# Altium PCB EvilDuckSD_pcb.PcbDoc
Units mm, origin at the board's own origin, x right, y up, seen from the top; angles counter-clockwise.
Board outline 40.39 x 17.78 mm, 2 copper layers (Top Layer, Bottom Layer); 25 components, 31 nets, 120 pads, 26 vias.
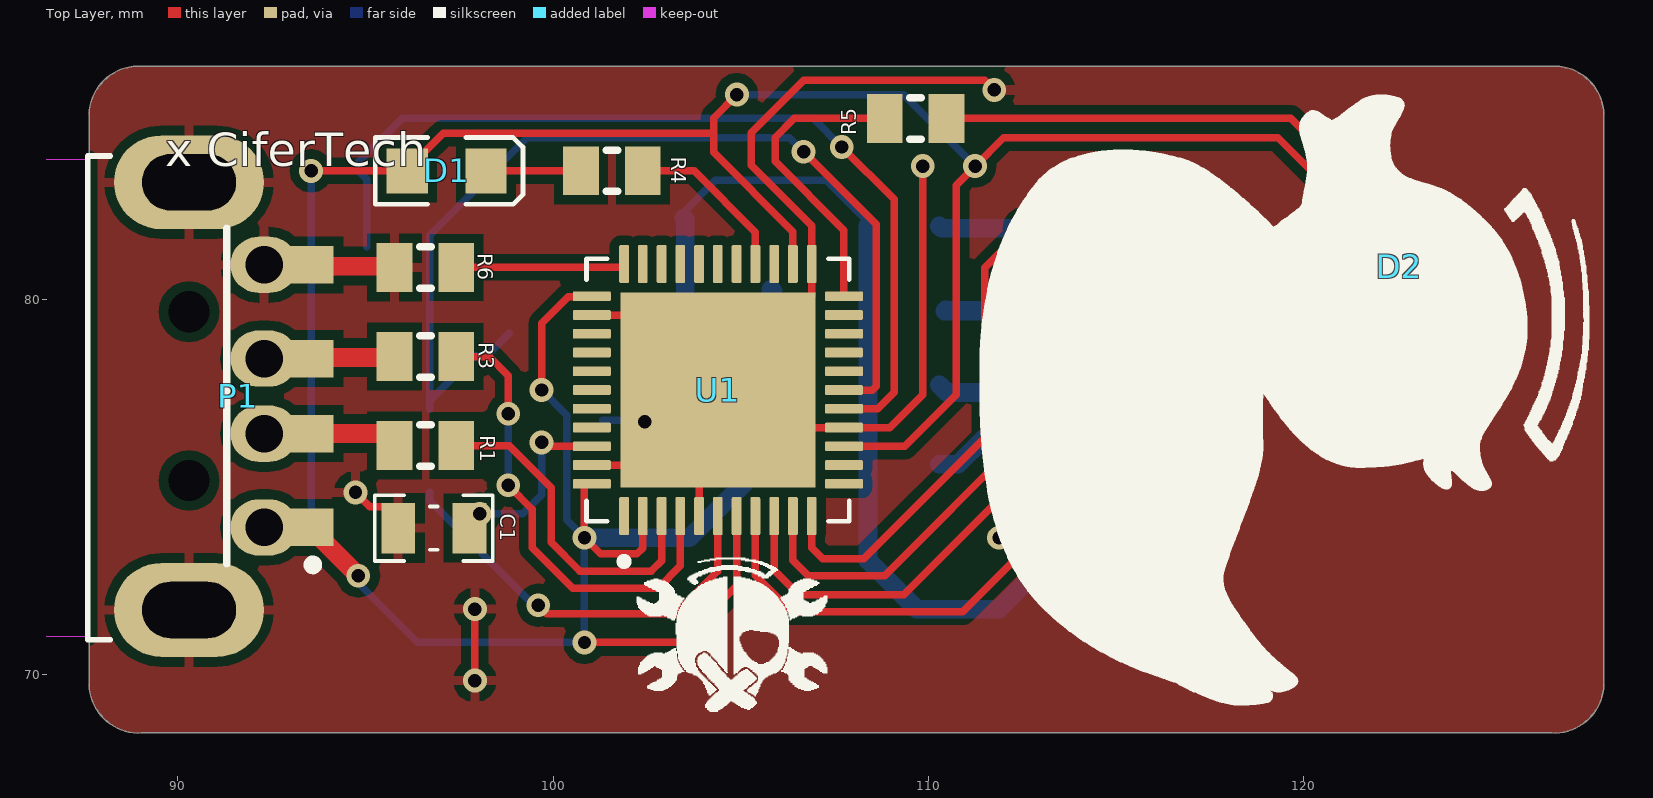
[diagram p0: Top Layer view]
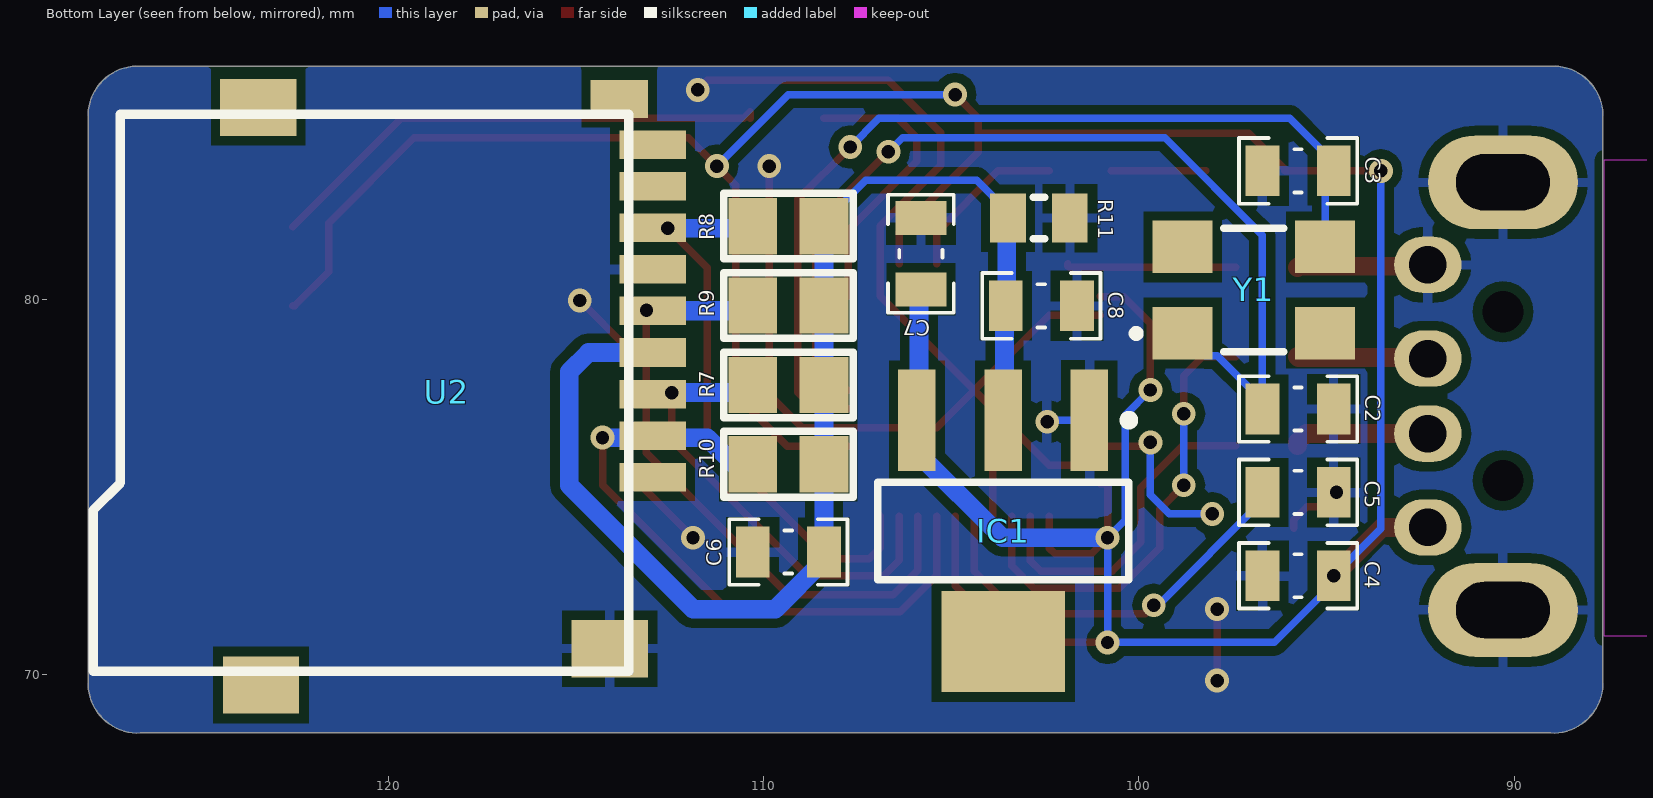
[diagram p1: Bottom Layer view, seen from below]
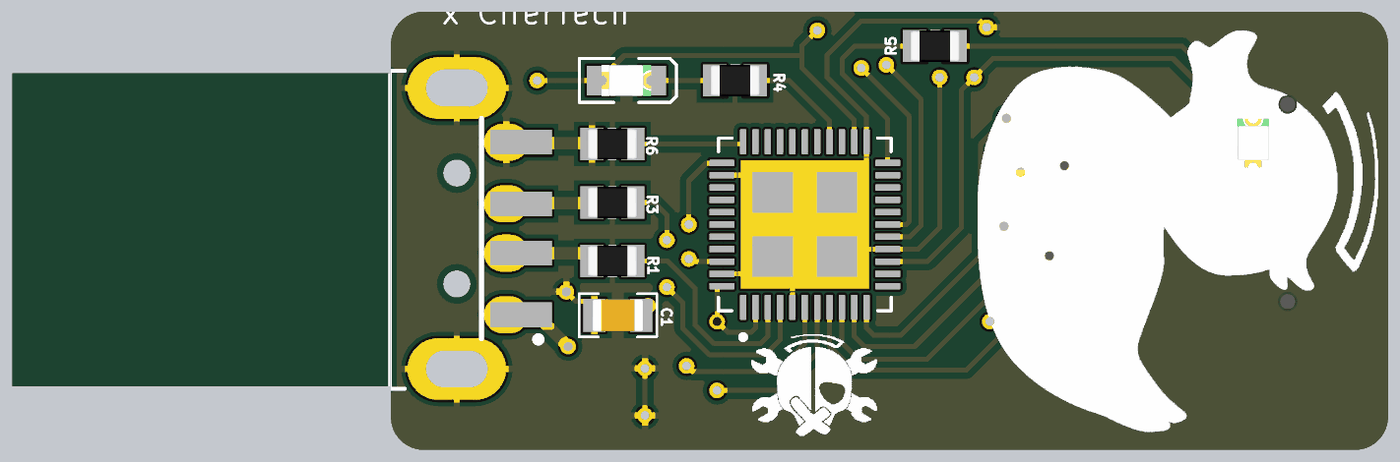
[diagram p2: 3D render of the assembled board from above, using the file's embedded part models]
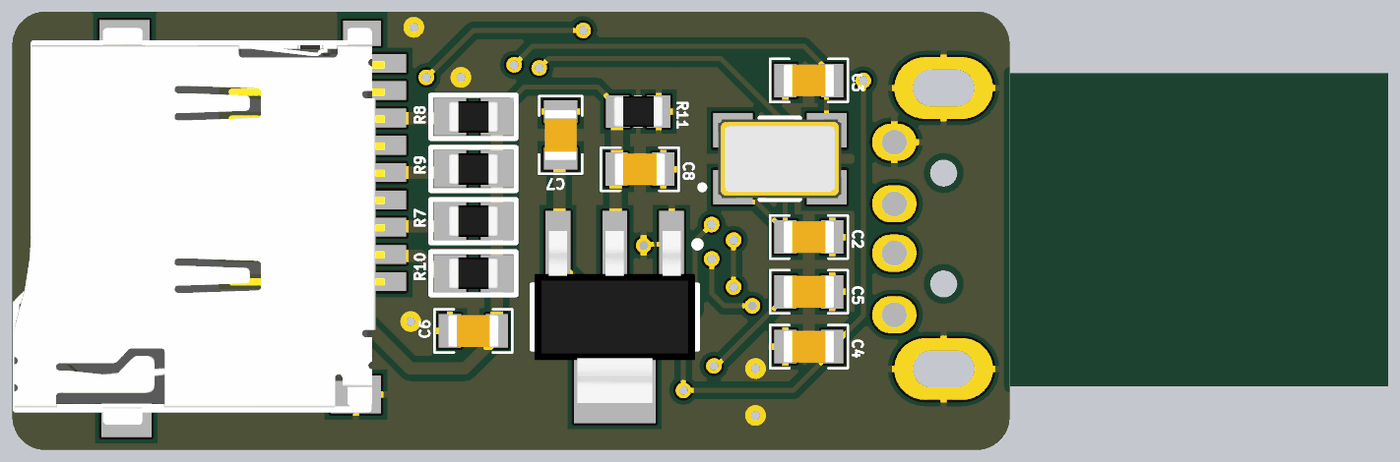
[diagram p3: 3D render of the assembled board from below, using the file's embedded part models]

## Layer stack, top to bottom
Top Solder: solder mask 0.0102, Solder Resist, Dk 3.5
Top Layer: signal copper 0.0356
Dielectric 1: dielectric 0.32, FR-4, Dk 4.8
Bottom Layer: signal copper 0.0356
Bottom Solder: solder mask 0.0102, Solder Resist, Dk 3.5

## Board outline
87.63,69.85 87.63,84.836 cw(c88.963,84.9) 89.027,86.233 126.619,86.233 cw(c126.682,84.9) 128.016,84.836 128.016,69.85 cw(c126.682,69.787) 126.619,68.453 89.027,68.453 cw(c88.963,69.787)

## Design rules (kind name [scope] priority, off if disabled: settings)
Clearance [All] p1: gap=0.254 ignorepadtopadclearanceinfootprint=FALSE except(0: Arc-Hole Track-Hole SMDPad-Hole THPad-Hole Via-Hole Fill-Hole Poly-Hole Region-Hole Text-Hole)
PolygonConnect [All] p1: connectstyle=Relief reliefconductorwidth=0.254 reliefentries=4 polygonreliefangle="90 Angle" airgapwidth=0.254
RoomDefinition EvilDuckSD_sch [InComponentClass('EvilDuckSD_sch')] p1: confinementstyle=ConfineIn formatcopy=TRUE lockcomponents=FALSE outline 0,0 50.8,0 50.8,25.4 0,25.4
RoutingVias [All] p1: holewidth=0.711 width=1.27 viastyle="Through Hole" minholewidth=0.711 minwidth=1.27 maxholewidth=0.711 maxwidth=1.27
SolderMaskExpansion [All] p1: expansion=0.102
Width [All] p1: maxlimit=1 minlimit=0.2 preferedwidth=0.5 minimp=50.000000 maximp=50.000000 favimp=50.000000
30 further rules are at their usual default settings.

## Components (designator, comment, footprint, x,y, rotation, side; value= is the part's Value field where it differs from the comment)
C1 "100nf" CAP0805 96.821,73.914 r0 top
C2 "22pf" CAP0805 95.758,77.089 r0 bottom
C3 "22pf" CAP0805 95.758,83.439 r180 bottom
C4 "1uf" CAP0805 95.758,72.644 r180 bottom
C5 "1uf" CAP0805 95.758,74.867 r0 bottom
C6 "100nf" CAP0805 109.347,73.279 r0 bottom
C7 "10uf" CAP0805 105.812,81.229 r270 bottom
C8 "10uf" CAP0805 102.603,79.841 r0 bottom
D1 "LED" LED_0805 97.164,83.439 r0 top
D2 "LED" LED_0805 122.555,80.899 r90 top
IC1 "LM1117" MP04A_M 103.619,73.842 r270 bottom
P1 "USB Connector" "USB A TYPE Right Angle" 87.597,77.434 r180 top
R1 "22" "RES 0805 (2012X06L)" 95.772,76.115 r0 top
R3 "22" "RES 0805 (2012X06L)" 95.772,78.489 r0 top
R4 "330" "RES 0805 (2012X06L)" 102.394,83.439 r180 top
R5 "330" "RES 0805 (2012X06L)" 108.839,84.836 r0 top
R6 "330" "RES 0805 (2012X06L)" 97.422,80.864 r180 top
R7 "10K" "RES 0805" 110.297,77.732 r270 bottom
R8 "10K" "RES 0805" 110.297,81.966 r270 bottom
R9 "10K" "RES 0805" 110.297,79.849 r270 bottom
R10 "10K" "RES 0805" 110.297,75.616 r270 bottom
R11 "330" "RES 0805 (2012X06L)" 101.842,82.179 r0 bottom
U1 "ATMEGA32U4-MU" QFN50P700X700X100-45N 104.394,77.596 r90 top
U2 "SD CARD SPI MODE" "MICRO SD" 113.602,84.947 r270 bottom
Y1 "16MHz" WE-XTAL_CFPX-104 96.935,80.264 r180 bottom

## Footprints (in the part's own frame and the unit in brackets; to place one, negate y for a bottom-side part, rotate by r counter-clockwise, add the part's x,y. Pads: shape width x height; smd on the part's side, far side on the other; paste and mask are expansions set on the pad)
CAP0805 [mm] "Chip Capacitor, 2-Leads, Body 2/00x1/25mm, IPC Medium Density DESIGNER:ABBAS BASEREH"
  rect 0.9x1.35 smd: 1(-0.95,0) 2(0.95,0)
  silkscreen extent -1.58,-0.87 1.58,0.87, body extent -1.02,-0.65 1.03,0.65, height 0.5
LED_0805 [mm] "Chip LED, 2-Leads, Body 2.0x1.3mm, IPC Medium Density"
  rect 1.1x1.2 smd: A(-1.05,0) K(1.05,0)
  silkscreen extent -1.91,-0.89 2.03,0.89, body extent -1,-0.63 1,0.62, height 0.68
"MICRO SD" [mil] "MICRO SD"
  rect 30x70 smd: 1(380.91,25.07) 2(337.29,25.07) 3(293.66,25.07) 4(250.04,25.07) 5(206.41,25.07) 6(162.79,25.07) 7(119.16,25.07) 8(75.54,25.07) 9(31.91,25.07)
  rect 60x80 smd: 6(-7.09,-388.93) 6(560.91,-19.93) 6(598.91,-385.93)
  rect 40x60 smd: 10(-16.09,-9.93)
  round 0 all layers, no hole: ""(97.44,-407.48) ""(414.37,-407.48)
  silkscreen extent 0,-562 585,0, body extent -25,-565 609,26, height 73
MP04A_M [mm] "SOT223, 4-Leads, Body 6.5x3.5mm, Pitch 2.3mm, Lead Span 7mm, IPC Low Density"
  rect 2.7x1 smd: 1(-2.95,2.3) 2(-2.95,0) 3(-2.95,-2.3)
  rect 2.7x3.3 smd: 4(2.95,0)
  silkscreen extent -3.07,-3.35 1.3,3.47, body extent -3.49,-3.24 3.49,3.24, height 1.64
QFN50P700X700X100-45N [mm]
  rrect25% 1.01x0.26 smd: 1(-3.36,2.5) 2(-3.36,2) 3(-3.36,1.5) 4(-3.36,1) 5(-3.36,0.5) 6(-3.36,0) 7(-3.36,-0.5) 8(-3.36,-1) 9(-3.36,-1.5) 10(-3.36,-2) 11(-3.36,-2.5) 23(3.36,-2.5) 24(3.36,-2) 25(3.36,-1.5) 26(3.36,-1) 27(3.36,-0.5) 28(3.36,0) 29(3.36,0.5) 30(3.36,1) 31(3.36,1.5) 32(3.36,2) 33(3.36,2.5)
  rrect25% 0.26x1.01 smd: 12(-2.5,-3.36) 13(-2,-3.36) 14(-1.5,-3.36) 15(-1,-3.36) 16(-0.5,-3.36) 17(0,-3.36) 18(0.5,-3.36) 19(1,-3.36) 20(1.5,-3.36) 21(2,-3.36) 22(2.5,-3.36) 34(2.5,3.36) 35(2,3.36) 36(1.5,3.36) 37(1,3.36) 38(0.5,3.36) 39(0,3.36) 40(-0.5,3.36) 41(-1,3.36) 42(-1.5,3.36) 43(-2,3.36) 44(-2.5,3.36)
  rect 5.2x5.2 smd paste-4: 45(0,0)
  silkscreen extent -4.67,-3.5 3.5,3.5
"RES 0805" [mm] "RES 0805"
  rect 1.5x1.3 smd: 1(0,0) 2(0,1.9)
  silkscreen extent -0.87,-0.77 0.87,2.68, body extent -0.63,-0.07 0.64,1.97, height 0.6
"RES 0805 (2012X06L)" [mm] "Chip Resistor, 2-Leads, Body 2.0x1.3mm, IPC High Density _ (0.100 W)"
  rect 0.95x1.3 smd: 1(0,0) 2(1.65,0)
  silkscreen extent 0.67,-0.55 0.97,0.55, body extent -0.19,-0.63 1.84,0.64, height 0.6
"USB A TYPE Right Angle" [mm] "Connector; USB1.1, Type A, SM; 4 Position; Right Angle DESIGNER ABBAS BASEREH"
  rect 2.5x1 smd: 1(-5.3,3.5) 2(-5.3,1) 3(-5.3,-1) 4(-5.3,-3.5)
  oval 1.8x1.5 hole 1: 1(-4.7,3.5) 2(-4.7,1) 3(-4.7,-1) 4(-4.7,-3.5)
  oval 4x2.5 hole 1.5 slot 2.5 at 0 deg: 4(-2.7,5.7) 4(-2.7,-5.7)
  round 0.8 hole 1.1 unplated: MH1(-2.7,-2.25) MH2(-2.7,2.25)
  Keep-Out Layer board cut-out: 0,6.4 0,-6.3 15.3,-6.3 15.3,6.4
  silkscreen extent -6.13,-6.4 0,6.5, body extent -4.9,-6.3 15.1,6.3, height 3.45
WE-XTAL_CFPX-104 [mm] "Quartz Crystal, size CFPX-104, body 5x3.2mm"
  rect 1.6x1.4 smd: 1(-1.9,-1.15) 2(1.9,-1.15) 3(1.9,1.15) 4(-1.9,1.15)
  silkscreen extent -3.24,-1.65 0.8,1.65, body extent -2.5,-1.6 2.5,1.6, height 0.95

## Part data
C1 C2 C3 C4 C5 C6 C7 C8: library part "CAP SMD", "Capacitor"
IC1: library part LM1117IMP-x.x, "x.x Volt, 800mA Low-Dropout Linear Regulator, 4-pin SOT-223", Manufacturer="National Semiconductor", PackageTopMarking=XYTT*N05B, PartNumber=LM1117IMP-3.3, PowerWise=N, Supplier Part Number 1=7614123, Code_IPC=SOT223-4, Code_JEDEC=TO-261-AA, ComponentLink1Description="LM1117 Datasheet", ComponentLink1URL=http://www.national.com/ds/LM/LM1117.pdf, ComponentLink2Description="LM1117 Web Page", ComponentLink2URL=http://www.national.com/pf/LM/LM1117.html, ComponentLink3Description="MP04A Package Page", ComponentLink3URL=http://www.national.com/packaging/folders/mp04a.html, CompType="LDO IC", DatasheetVersion=Apr-2006, PackageDescription="Molded SOT-223, 6.50 x 3.56 x 1.6mm Body, 4 Lead, 2.3mm Pitch", PackageReference=MP04A, PackageVersion="revB, Apr-2003", PinCount=4, Published=4-Dec-2008, Publisher="Altium Limited", RoHS=N, Supplier 1=Farnell
P1: library part "USB A-Type", "USB Connector-A Type"
R1 R3 R4 R5 R6 R7 R8 R9 R10 R11: library part RES, "RESISTOR"
U1: "8-bit Microcontrollers - MCU AVR USB 32K FLASH INDUSTRIA", Package=None, Availability=Unavailable, MP=ATMEGA32U4-MU, Price=None
Y1: library part 830030819, "WE-XTAL Quartz Crystal, SMT, CFPX-104, 16MHz, +/-50ppm", Frequency Stability=+/-50ppm, Load Capacitance=18pF, Manufacturer="Wurth Elektronik", Operating Temperature="-10 to +60degC", ComponentLink1Description=Manufacturer, ComponentLink1URL=http://www.we-online.de, ComponentLink2Description=Datasheet, ComponentLink2URL=https://katalog.we-online.com/pbs/datasheet/830030819.pdf, Frequency=16MHz, Frequency Tolerance=+/-50ppm, Manufacturer Part Number=830030819, Mounting Technology=SMT, Packaging="Tape and Reel", Published Date="July 2020", Size=CFPX-104

## Via types
v1: diameter 0.635, hole 0.356, Top Layer to Bottom Layer, 26 vias

## Nets (pads, with @x,y where several pads share a name; then routed paths per layer and width w, separated by ;. In a path a pad name is that pad's centre, name@x,y a point inside that pad or via, vN(x,y) a via of type N, cw(c..) or ccw(c..) an arc to the next point about the centre after c; other vN are vias at no path point)
3v3: C6.1 C8.2 IC1.2 R7.2 R8.2 R9.2 R10.2 R11.2 U2.4 | length 34.5
  Bottom Layer w0.2: R11.2 103.492,82.354 104.323,83.185 107.278,83.185 108.397,82.066 R8.2
  Bottom Layer w0.5: R11.2 103.523,82.148 103.523,79.871 C8.2 103.586,79.808 103.586,76.825 IC1.2 ; R8.2 R9.2 R7.2 R10.2 C6.1 108.397,73.054 109.696,71.755 111.887,71.755 115.189,75.057 115.189,78.08 114.673,78.596 U2.4
5v: C4.2 C7.2 D1.A D2.A IC1.3 P1.1 U1.2 U1.7 U1.14 U1.24 U1.34 U1.44 | length 100.5
  Top Layer w0.2: v1(93.551,83.439) D1.A 96.114,83.489 96.939,84.314 97.068,84.443 104.279,84.443 ; v1(99.695,77.597) 99.695,79.374 100.401,80.08 101.018,80.08 U1.34 ; v1(100.838,70.866) 103.378,70.866 104.894,72.382 U1.7 ; U1.44 100.868,75.096 100.838,75.066 v1(100.838,73.66) 101.273,73.225 102.235,73.225 102.394,73.384 U1.2 ; v1(104.902,85.471) 104.279,84.848 104.279,84.443 ; U1.24 106.394,81.82 104.279,83.935 104.279,84.443 ; U1.14 109.37,76.096 110.744,77.47 110.744,83.058 v1(111.252,83.566) 112.014,84.328 119.315,84.328 121.601,82.042 121.601,80.753 122.505,79.849 D2.A
  Top Layer w0.5: P1.1@92.897,73.934 93.518,73.934 v1(94.808,72.644)
  Bottom Layer w0.2: v1(93.551,83.439) 93.551,73.901 v1(94.808,72.644) 94.808,72.451 96.393,70.866 v1(100.838,70.866) v1(100.838,73.66) 100.366,74.132 100.366,76.926 v1(99.695,77.597) ; v1(104.902,85.471) 109.347,85.471 v1(111.252,83.566)
  Bottom Layer w0.5: v1(100.838,73.66) 103.637,73.66 105.919,75.942 IC1.3 105.866,76.846 105.866,80.225 C7.2
A0: U1.41
A1: U1.40
A2: U1.39
A3: U1.38
A4: U1.37
A5: U1.36
CLK: R9.1 U1.9 U2.5 | length 19.5
  Top Layer w0.2: U1.9 105.894,72.795 106.553,72.136 109.347,72.136 113.13,75.919 v1(113.13,79.72)
  Bottom Layer w0.5: U2.5 110.442,79.704 110.468,79.731 110.479,79.72 v1(113.13,79.72)
CS: R10.1 U1.8 U2.2 | length 17.9
  Top Layer w0.2: U1.8 105.394,72.653 106.365,71.682 110.925,71.682 114.3,75.057 v1(114.3,76.327)
  Bottom Layer w0.5: R10.1 110.795,75.616 111.506,76.327 U2.2@113.018,76.327 ; U2.2 U2.2@113.018,76.327 ; v1(114.3,76.327) U2.2@113.018,76.327
D+: R3.2 U1.4 | length 12.4
  Top Layer w0.2: R3.2 98.295,78.489 98.806,77.978 v1(98.806,76.962) ; v1(98.806,75.057) 99.452,74.411 99.452,73.388 100.523,72.317 102.804,72.317 103.394,72.907 U1.4
  Bottom Layer w0.2: v1(98.806,75.057) v1(98.806,76.962)
D-: R1.2 U1.3 | length 9
  Top Layer w0.2: R1.2 98.83,76.115 99.949,74.996 99.949,73.533 100.711,72.771 102.616,72.771 102.894,73.049 U1.3
GND: C1.1 C2.1 C3.1 C4.1 C5.1 C6.2 C7.1 C8.1 IC1.1 P1.4 R6.2 R11.1 U1.5 U1.15 U1.23 U1.35 U1.43 U1.45 U2.6@112.965,80.812 U2.6@114.108,70.7 | length 54.5
  Top Layer w0.2: v1(94.733,74.867) 95.111,74.489 95.52,74.489 95.871,74.139 C1.1 ; v1(97.917,69.85) v1(97.917,71.755) ; U1.43 102.394,75.596 U1.45@103.894,77.096 ; U1.35 102.394,79.596 U1.45 ; U1.5 U1.45@103.894,77.096 ; v1(109.855,83.566) 109.855,77.47 108.981,76.596 U1.15 105.394,76.596 U1.45 ; v1(111.76,85.598) 111.506,85.852 106.68,85.852 105.283,84.455 105.283,83.587 106.894,81.976 U1.23 106.894,80.096 U1.45 ; v1(111.887,73.66) 113.629,75.402 113.629,78.704 v1(114.91,79.985) v1@114.935,80.01 ; U1.45@103.894,77.096 U1.45
  Top Layer w0.5: P1.4@92.897,80.934 92.932,80.899 95.737,80.899 R6.2
  Bottom Layer w0.2: IC1.1 102.405,76.792 v1(102.447,76.75)
MISO: R8.1 U1.11 U2.7 | length 15.6
  Top Layer w0.2: U1.11 106.894,73.392 107.188,73.098 108.277,73.098 111.506,76.327 111.506,80.854 v1(112.56,81.908)
  Bottom Layer w0.5: R8.1 110.355,81.908 v1(112.56,81.908) 112.953,81.908 U2.7
MOSI: R7.1 U1.10 U2.3 | length 12.9
  Top Layer w0.2: U1.10 106.394,73.057 106.807,72.644 108.839,72.644 112.459,76.263 v1(112.459,77.527)
  Bottom Layer w0.5: R7.1 110.502,77.527 v1(112.459,77.527) 112.926,77.527 U2.3
NetC1_2: C1.2 U1.42 | length 4.6
  Top Layer w0.2: v1(99.695,76.2) 99.822,76.2 99.926,76.096 U1.42
  Bottom Layer w0.2: v1(98.044,74.295) 99.187,74.295 99.695,74.803 v1(99.695,76.2)
NetC5_2: C5.2 U1.6 | length 11.1
  Top Layer w0.2: v1(99.604,71.859) 99.835,71.628 103.251,71.628 104.394,72.771 U1.6
  Bottom Layer w0.2: C5.2 96.708,74.642 99.49,71.859 v1(99.604,71.859)
NetD1_K: D1.K R4.2 | length 2.5
  Top Layer w0.2: D1.K R4.2
NetD2_K: D2.K R5.2 | length 13.6
  Top Layer w0.2: R5.2@110.362,84.836 110.362,85.011 110.537,84.836 119.668,84.836 D2.K
NetP1_2: P1.2 R1.1 | length 3.1
  Top Layer w0.5: P1.2@92.897,76.434 95.547,76.434 95.772,76.209 R1.1
NetP1_3: P1.3 R3.1 | length 2.9
  Top Layer w0.5: P1.3@92.897,78.434 92.925,78.462 95.744,78.462 R3.1
NetR4_1: R4.1 U1.26 | length 4.5
  Top Layer w0.2: R4.1 103.759,83.439 105.394,81.804 U1.26
NetR5_1: R5.1 U1.22 | length 7.7
  Top Layer w0.2: U1.22 107.754,81.857 105.918,83.693 105.918,84.328 106.426,84.836 R5.1@108.397,84.836
NetR6_1: R6.1 U1.33 | length 4.5
  Top Layer w0.2: R6.1 101.864,80.864 101.894,80.894 U1.33
RESET: U1.13
RXD: U1.20
SCL: U1.18
SDA: U1.19
TXD: U1.21
XTAL1: C2.2 U1.17 Y1.1 | length 26.7
  Top Layer w0.2: v1(106.68,83.947) 108.613,82.014 108.613,77.698 108.511,77.596 U1.17
  Bottom Layer w0.2: C2.2 C2.2@96.708,77.314 ; Y1.1 98.235,78.514 97.908,78.514 C2.2@96.708,77.314 ; v1(106.68,83.947) 106.299,84.328 99.314,84.328 96.708,81.722 C2.2@96.708,77.314
XTAL2: C3.2 U1.16 Y1.3 | length 24.7
  Top Layer w0.2: v1(107.696,84.074) 109.093,82.677 109.093,77.536 108.653,77.096 U1.16
  Bottom Layer w0.2: Y1.3 95.035,83.212 C3.2 94.808,83.664 95.98,84.836 106.934,84.836 v1(107.696,84.074)
pads on no net: IC1.4 P1.MH1 P1.MH2 U1.1 U1.12 U1.25 U1.27 U1.28 U1.29 U1.30 U1.31 U1.32 U2. U2.1 U2.6@123.405,69.735 U2.6@123.481,85.127 U2.8 U2.9 U2.10 Y1.2 Y1.4

## Polygon pours and split planes (outlines as drawn)
GND on Bottom Layer "Top Layer-No Net1" (solid, pour order 1): 87.63,69.85 87.63,84.836 cw(c88.963,84.9) 89.027,86.233 126.619,86.233 cw(c126.682,84.9) 128.016,84.836 128.016,69.85 cw(c126.682,69.787) 126.619,68.453 89.027,68.453 cw(c88.963,69.787)
GND on Top Layer "Top Layer-No Net" (solid, pour order 2): 87.63,69.85 87.63,84.836 cw(c88.963,84.9) 89.027,86.233 126.619,86.233 cw(c126.682,84.9) 128.016,84.836 128.016,69.85 cw(c126.682,69.787) 126.619,68.453 89.027,68.453 cw(c88.963,69.787)

## Silkscreen, mask and mechanical layers (free items; w line width, h text height)
Top Overlay:
  drawing of 2394 lines, arcs and shapes, not listed
  text "x CiferTech" at 89.662,83.566 h0.9
Mechanical 1:
  the board outline again, w0.254

## Text inside footprints (layer, text, board x,y; h text height)
P1: Mechanical 1 "PCB Edge" at 87.124,82.607 h0.25 r270